# Altium PCB 实验.PcbDoc
Units mil, origin at the board's own origin, x right, y up, seen from the top; angles counter-clockwise.
Board outline 6000 x 4000 mil, 2 copper layers (Top Layer, Bottom Layer); 43 components, 31 nets, 225 pads, 0 vias.
Unrouted connection lines stored in the file: 180.
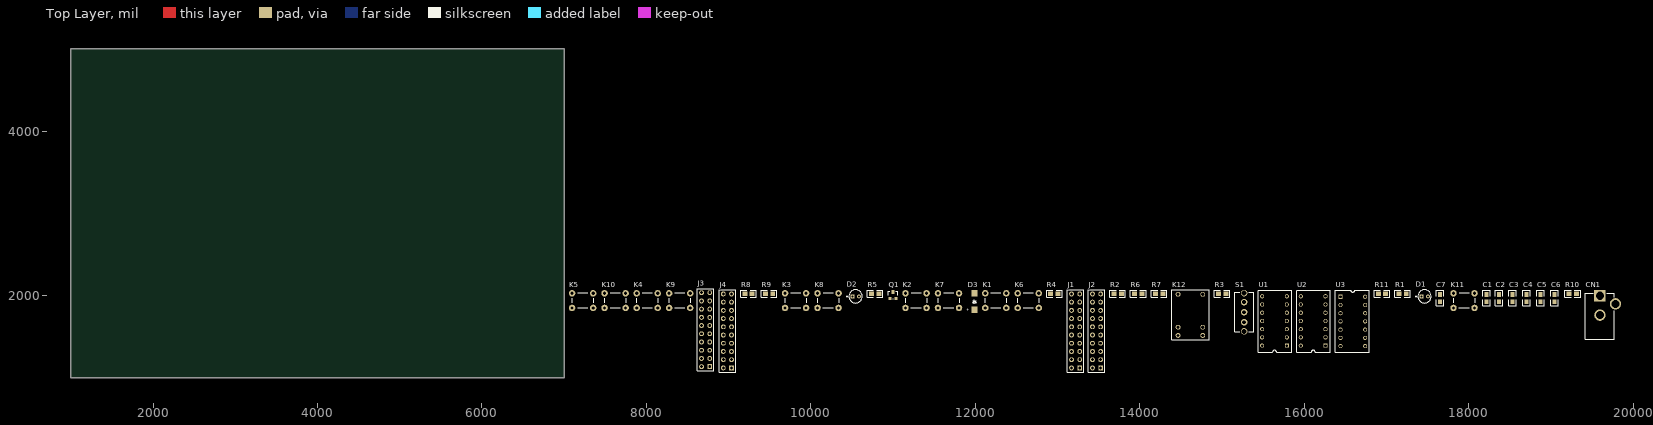
[diagram p0: Top Layer view]
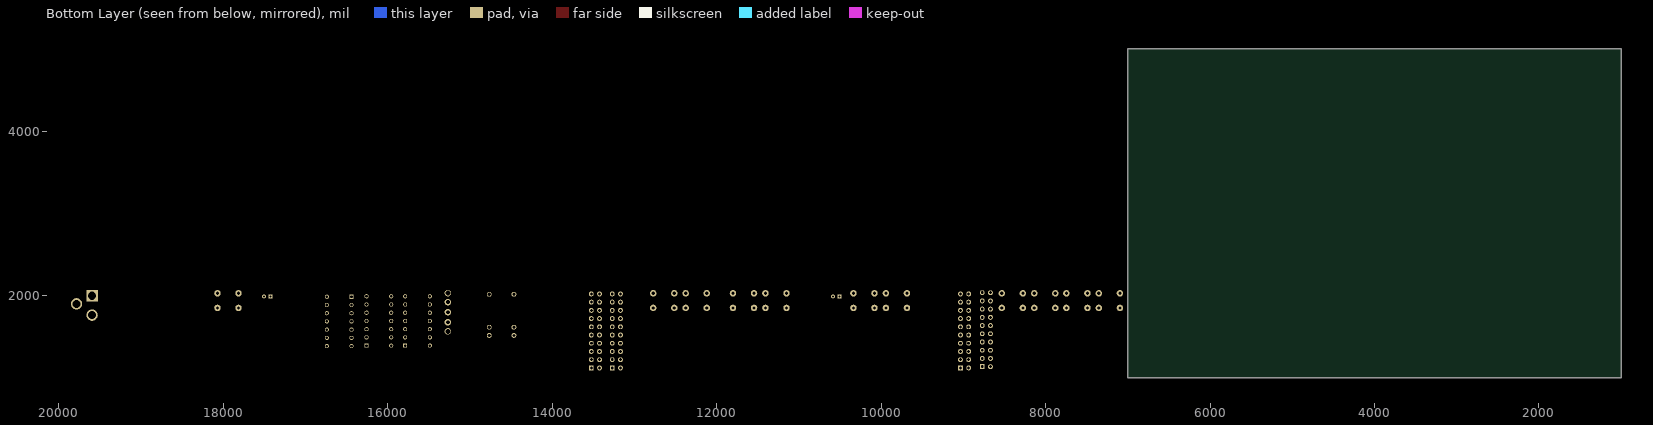
[diagram p1: Bottom Layer view, seen from below]

## Layer stack, top to bottom
Top Solder: solder mask 0.4, Solder Resist, Dk 3.5
Top Layer: signal copper 1.4
Dielectric 1: dielectric 12.6, FR-4, Dk 4.8
Bottom Layer: signal copper 1.4
Bottom Solder: solder mask 0.4, Solder Resist, Dk 3.5

## Board outline
1000,1000 7000,1000 7000,5000 1000,5000

## Design rules (kind name [scope] priority, off if disabled: settings)
Clearance [All] p1: gap=10 ignorepadtopadclearanceinfootprint=FALSE except(0: Arc-Hole Track-Hole SMDPad-Hole THPad-Hole Via-Hole Fill-Hole Poly-Hole Region-Hole Text-Hole)
PolygonConnect [All] p1: connectstyle=Relief reliefconductorwidth=10 reliefentries=4 polygonreliefangle="90 Angle" airgapwidth=10
RoomDefinition 原理图 [InComponentClass('原理图')] p1: confinementstyle=ConfineIn formatcopy=TRUE lockcomponents=FALSE outline 7045,1060 19865,1060 19865,2180 7045,2180
RoutingVias [All] p1: holewidth=28 width=50 viastyle="Through Hole" minholewidth=28 minwidth=50 maxholewidth=28 maxwidth=50
SolderMaskExpansion [All] p1: expansion=4 istentingtop=FALSE
Width [All] p1: maxlimit=10 minlimit=10 preferedwidth=10
30 further rules are at their usual default settings.

## Components (designator, comment, footprint, x,y, rotation, side; value= is the part's Value field where it differs from the comment)
C1 "10uF" 0805 18215,1925 r90 top
C2 "10uF" 0805 18370,1925 r90 top
C3 "10uF" 0805 18535,1925 r90 top
C4 "10uF" 0805 18705,1925 r90 top
C5 "10uF" 0805 18875,1925 r90 top
C6 "10uF" 0805 19045,1925 r90 top
C7 "10uF" 0805 17650,1925 r90 top
CN1 "DC JACK" "DC JACK" 19780,1460 r90 top
D1 "LED" 3MM插件LED 17345,1960 r0 top
D2 "LED" 3MM插件LED 10425,1960 r0 top
D3 "1N4148" 1N5819 11990,1830 r90 top
J1 "HEADER 10X2" HDR2X10 13270,1120 r90 top
J2 "HEADER 10X2" HDR2X10 13525,1120 r90 top
J3 "HEADER 10X2" HDR2X10 8770,1135 r90 top
J4 "HEADER 10X2" HDR2X10 9035,1120 r90 top
K1 "SW6X6轻触开关" SW6X6轻触开关 12080,1805 r0 top
K2 "SW6X6轻触开关" SW6X6轻触开关 11110,1805 r0 top
K3 "SW6X6轻触开关" SW6X6轻触开关 9645,1805 r0 top
K4 "SW6X6轻触开关" SW6X6轻触开关 7840,1805 r0 top
K5 "SW6X6轻触开关" SW6X6轻触开关 7055,1805 r0 top
K6 "SW6X6轻触开关" SW6X6轻触开关 12475,1805 r0 top
K7 "SW6X6轻触开关" SW6X6轻触开关 11505,1805 r0 top
K8 "SW6X6轻触开关" SW6X6轻触开关 10040,1805 r0 top
K9 "SW6X6轻触开关" SW6X6轻触开关 8235,1805 r0 top
K10 "SW6X6轻触开关" SW6X6轻触开关 7450,1805 r0 top
K11 "SW6X6轻触开关" SW6X6轻触开关 17775,1805 r0 top
K12 "SRS-05VDC-SL" 继电器 14845,1460 r90 top
Q1 "SS8050" S8050 10960,1965 r0 top
R1 "1K" 0805贴片电阻 17095,1970 r0 top
R2 "1K" 0805贴片电阻 13630,1970 r0 top
R3 "1K" 0805贴片电阻 14900,1970 r0 top
R4 "1K" 0805贴片电阻 12860,1970 r0 top
R5 "1K" 0805贴片电阻 10680,1970 r0 top
R6 "10K" 0805贴片电阻 13880,1970 r0 top
R7 "10K" 0805贴片电阻 14135,1970 r0 top
R8 "10K" 0805贴片电阻 9140,1970 r0 top
R9 "10K" 0805贴片电阻 9390,1970 r0 top
R10 "10K" 0805贴片电阻 19165,1970 r0 top
R11 "10K" 0805贴片电阻 16845,1970 r0 top
S1 "CON5" 拨动开关5脚 16005,1120 r90 top
U1 "74LS74D" 74LS74D 15870,1300 r90 top
U2 "74LS74D" 74LS74D 16340,1300 r90 top
U3 "SN74LS32" 74LS32 16375,1305 r0 top

## Footprints (in the part's own frame and the unit in brackets; to place one, negate y for a bottom-side part, rotate by r counter-clockwise, add the part's x,y. Pads: shape width x height; smd on the part's side, far side on the other; paste and mask are expansions set on the pad)
1N5819 [mm]
  rect 2x1.8 smd: 1(0,0) 2(5,0)
  silkscreen extent 1.76,-0.49 3.05,0.52
3MM插件LED [mm]
  rect 1.2x1.2 hole 0.6: 1(2.067,0.758)
  round 1.2 hole 0.6: 2(4.067,0.758)
  silkscreen extent 0.15,-1.29 5.07,2.81
74LS32 [mil]
  rect 50x50 hole 32: 1(66.65,680.47)
  round 50 hole 32: 2(66.65,580.47) 3(66.65,480.47) 4(66.65,380.47) 5(66.65,280.47) 6(66.65,180.47) 7(66.65,80.47) 8(366.65,80.47) 9(366.65,180.47) 10(366.65,280.47) 11(366.65,380.47) 12(366.65,480.47) 13(366.65,580.47) 14(366.65,680.47)
  silkscreen extent 6,6 415,761
74LS74D [mil]
  rect 50x50 hole 32: 1(91.18,81.42)
  round 50 hole 32: 2(191.18,81.42) 3(291.18,81.42) 4(391.18,81.42) 5(491.18,81.42) 6(591.18,81.42) 7(691.18,81.42) 8(691.18,381.42) 9(591.18,381.42) 10(491.18,381.42) 11(391.18,381.42) 12(291.18,381.42) 13(191.18,381.42) 14(91.18,381.42)
  silkscreen extent 10,20 765,430
0805 [mil]
  rect 60x50 smd: 1(0,0) 2(90,0)
  silkscreen extent -50,-45 140,45
0805贴片电阻 [mil]
  rect 60x50 smd: 1(56.34,52.4) 2(146.34,52.4)
  silkscreen extent 6,7 196,97
"DC JACK" [mm]
  rect 3.5x3.5 hole 2.5: 1(13.655,4.661)
  round 3.5 hole 2.5: 2(7.655,4.661) 3(11.155,-0.139)
  silkscreen extent 0.16,0.16 14.35,9.16
HDR2X10 [mm] "Connector; Header; 10x2 Position"
  rect 1.5x1.5 hole 0.9: 1(0,0)
  round 1.5 hole 0.9: 2(0,2.54) 3(2.54,0) 4(2.54,2.54) 5(5.08,0) 6(5.08,2.54) 7(7.62,0) 8(7.62,2.54) 9(10.16,0) 10(10.16,2.54) 11(12.7,0) 12(12.7,2.54) 13(15.24,0) 14(15.24,2.54) 15(17.78,0) 16(17.78,2.54) 17(20.32,0) 18(20.32,2.54) 19(22.86,0) 20(22.86,2.54)
  silkscreen extent -1.27,-1.27 24.13,3.81
S8050 [mil]
  rect 36x36 smd: 1(0,0) 2(75,0)
  rect 36x50 smd: 3(38,80)
  silkscreen extent -20,-5 95,85
SW6X6轻触开关 [mm]
  round 2 hole 1: 1(1.038,5.641) 2(7.538,5.641) 3(1.038,1.141) 4(7.538,1.141)
  silkscreen extent 1.05,1.13 7.7,5.85
拨动开关5脚 [mm]
  round 2 hole 1.5: 1(11.303,18.673) 5(23.103,18.673)
  round 2 hole 1.2: 2(14.103,18.673) 3(17.203,18.673) 4(20.303,18.673)
  silkscreen extent 11.1,15.77 23.3,21.57
继电器 [mm]
  round 1.5 hole 1: 1(14.1,1.999) 1(14.1,9.619) 2(1.4,1.999) 3(1.4,9.619) 4(3.94,9.619) 5(3.94,1.999)
  silkscreen extent 0.05,0.01 15.45,11.61

## Part data
C1 C2 C3 C4 C5 C6 C7: library part Cap, "10uF，0805，25V,+/-10%", LatestRevisionDate=17-Jul-2002, LatestRevisionNote="Re-released for DXP Platform.", PackageReference=RAD-0.3, Published=8-Jun-2000, Publisher="Altium Limited"
CN1: "DC JACK电源插座,5.5mm孔径,3脚接插件"
D1 D2: library part 3MM插件LED, "3MM插件LED，绿发绿光，3mm"
D3: library part DIODE_1
K1 K2 K3 K4 K5 K6 K7 K8 K9 K10 K11: "6*6mm*4.5mm轻触开关,4脚插件,180°"
K12: library part 继电器
Q1: library part S8050, "SOT23,3-pin,NPN型三极管，s8050"
R1 R2 R3 R4 R5 R6 R7 R8 R9 R10 R11: library part 0805贴片电阻, "1KΩ,0805,±5%"
S1: library part 拨动开关5脚, "SWITCH"

## Nets (pads, with @x,y where several pads share a name; then routed paths per layer and width w, separated by ;. In a path a pad name is that pad's centre, name@x,y a point inside that pad or via, vN(x,y) a via of type N, cw(c..) or ccw(c..) an arc to the next point about the centre after c; other vN are vias at no path point)
1B: U2.5 U3.2
1CK1: J1.2 J1.4 J1.6 J1.8 J1.10 J1.12 J1.14 J1.16 J1.18 J1.20 R6.1 U1.3
1CK2: J3.2 J3.4 J3.6 J3.8 J3.10 J3.12 J3.14 J3.16 J3.18 J3.20 R8.1 U2.3
2CK1: J2.2 J2.4 J2.6 J2.8 J2.10 J2.12 J2.14 J2.16 J2.18 J2.20 R7.1 U1.11
2CK2: J4.2 J4.4 J4.6 J4.8 J4.10 J4.12 J4.14 J4.16 J4.18 J4.20 R9.1 U2.11
2CLR: C7.1 K11.3 K11.4 R10.1 R11.1 U2.13
2D: U1.5 U1.12
3D: U1.9 U2.2
4D: U2.12 U3.3
+5v: CN1.1 S1.2
CLR: R3.2 U1.1 U1.13 U2.1
GND: C1.2 C2.2 C3.2 C4.2 C5.2 C6.2 C7.2 CN1.2 CN1.3 D1.2 D2.2 K11.1 K11.2 Q1.2 R6.2 R7.2 R8.2 R9.2 R11.2 S1.1 S1.5 U1.7 U2.7 U3.7
K0: J1.1 J2.1 J3.1 J4.1 K1.1 K1.2
K1: J1.3 J2.3 J3.3 J4.3 K2.1 K2.2
K2: J1.5 J2.5 J3.5 J4.5 K3.1 K3.2
K3: J1.7 J2.7 J3.7 J4.7 K4.1 K4.2
K4: J1.9 J2.9 J3.9 J4.9 K5.1 K5.2
K5: J1.11 J2.11 J3.11 J4.11 K6.1 K6.2
K6: J1.13 J2.13 J3.13 J4.13 K7.1 K7.2
K7: J1.15 J2.15 J3.15 J4.15 K8.1 K8.2
K8: J1.17 J2.17 J3.17 J4.17 K9.1 K9.2
K9: J1.19 J2.19 J3.19 J4.19 K10.1 K10.2
NetD1_1: D1.1 R1.2
NetD2_1: D2.1 R4.1
NetD3_1: D3.1 K12.5 Q1.3
NetK1_3: K1.3 K1.4 K2.3 K2.4 K3.3 K3.4 K4.3 K4.4 K5.3 K5.4 K6.3 K6.4 K7.3 K7.4 K8.3 K8.4 K9.3 K9.4 K10.3 K10.4 R2.2
NetK12_3: K12.3 R4.2
NetQ1_1: Q1.1 R5.2
NetR3_1: R3.1 U2.8
VCC: C1.1 C2.1 C3.1 C4.1 C5.1 C6.1 D3.2 K12.1 K12.4 R1.1 R2.1 R10.2 S1.3 U1.2 U1.4 U1.10 U1.14 U2.4 U2.10 U2.14 U3.14
Vo: R5.1 U2.9 U3.1
pads on no net: K12.2 S1.4 U1.6 U1.8 U2.6 U3.4 U3.5 U3.6 U3.8 U3.9 U3.10 U3.11 U3.12 U3.13

## Text inside footprints (layer, text, board x,y; h text height)
D3: Top Overlay "+" at 11925,1810 h30 r90